# Allegro board topeet_rk3568_main_v1_71_20260327.brd
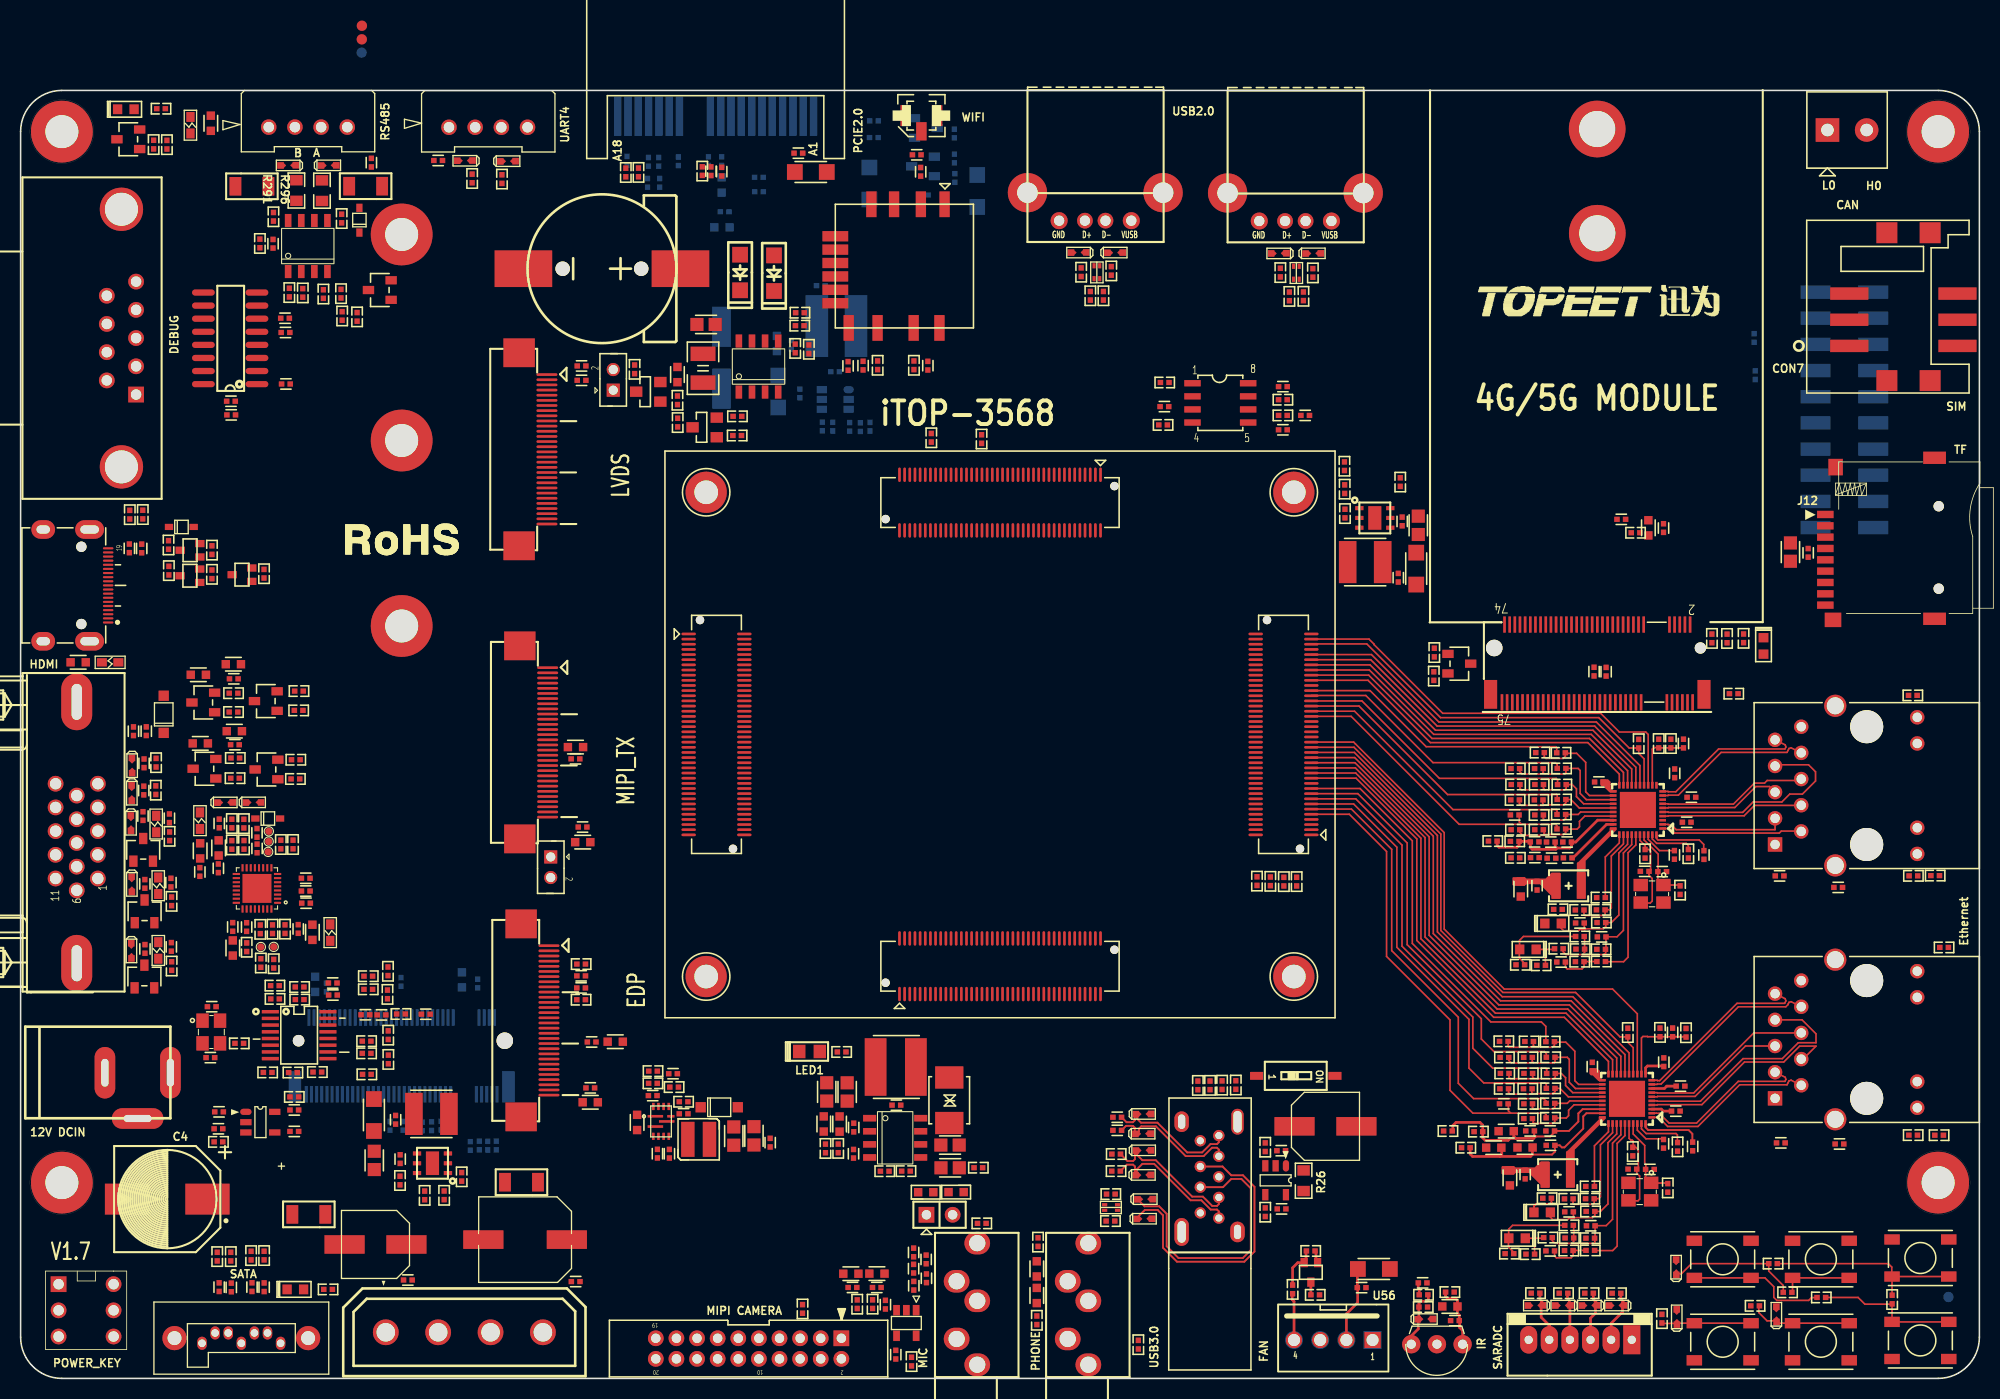
[diagram p0: board, top side]
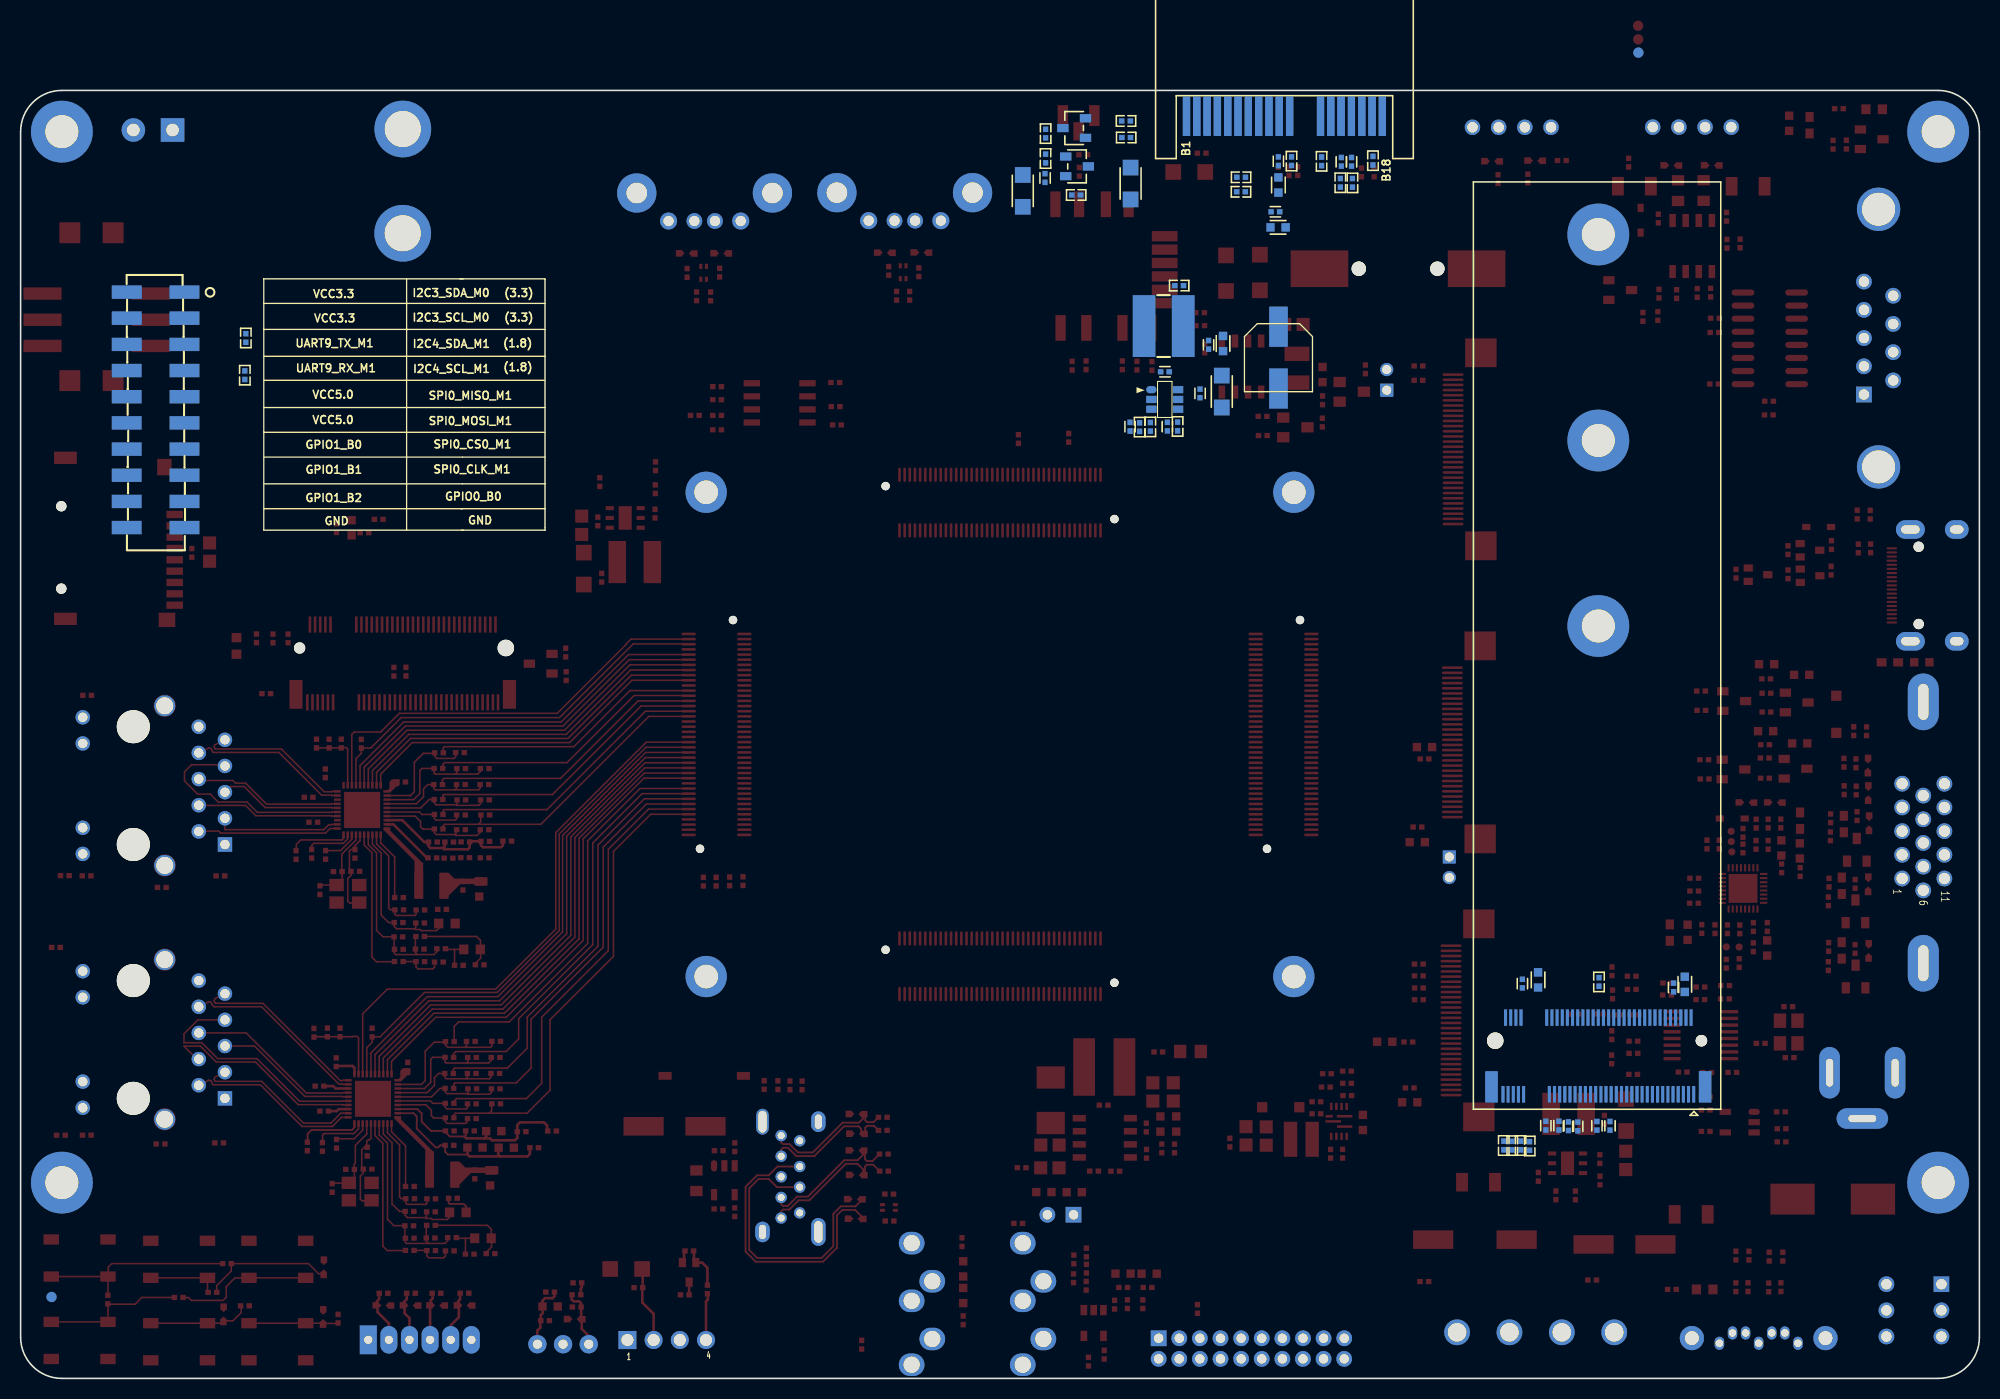
[diagram p1: board, bottom side, seen from below]

Outline 190 x 125 mm; copper layers: TOP, GND02, SIG03, BOTTOM. Coordinates in mm from the lower left corner of the outline.
Outline path: 0,121 0,4 arc(1.17,1.17) 4,0 186,0 arc(188.83,1.17) 190,4 190,121 arc(188.83,123.83) 186,125 4,125 arc(1.17,123.83) 0,121

## Design rules (mm)
constraint set DEFAULT: min track width 0.152, pair gap 0.178
net group DIFFPAIR0: nets HDMI_TXCLKN_PORT HDMI_TXCLKP_PORT
net group DIFFPAIR1: nets HDMI_TX0N_PORT HDMI_TX0P_PORT
net group DIFFPAIR2: nets HDMI_TX1N_PORT HDMI_TX1P_PORT
net group DIFFPAIR3: nets HDMI_TX2N_PORT HDMI_TX2P_PORT
net group DIFFPAIR4: nets MIPI_DSI_TX1_D3N/LVDS_TX1_D3N MIPI_DSI_TX1_D3P/LVDS_TX1_D3P
net group DIFFPAIR5: nets MIPI_DSI_TX1_D2N/LVDS_TX1_D2N MIPI_DSI_TX1_D2P/LVDS_TX1_D2P
net group DIFFPAIR6: nets MIPI_DSI_TX1_CLKN/LVDS_TX1_CLKN MIPI_DSI_TX1_CLKP/LVDS_TX1_CLKP
net group DIFFPAIR7: nets MIPI_DSI_TX1_D1N/LVDS_TX1_D1N MIPI_DSI_TX1_D1P/LVDS_TX1_D1P
net group DIFFPAIR8: nets MIPI_DSI_TX1_D0N/LVDS_TX1_D0N MIPI_DSI_TX1_D0P/LVDS_TX1_D0P
net group DIFFPAIR9: nets PCIE30_RX1N PCIE30_RX1P
net group DIFFPAIR10: nets PCIE30_RX0N PCIE30_RX0P
net group DIFFPAIR11: nets PCIE30_TX1N PCIE30_TX1P
net group DIFFPAIR12: nets PCIE30_TX0N PCIE30_TX0P
net group DIFFPAIR13: nets PCIE30_REFCLKN_IN PCIE30_REFCLKP_IN
net group DIFFPAIR14: nets PCIE20_RXN PCIE20_RXP
net group DIFFPAIR15: nets PCIE20_TXN PCIE20_TXP
net group DIFFPAIR16: nets USB2_HOST3_DM USB2_HOST3_DP
net group DIFFPAIR17: nets USB2_HOST2_DM USB2_HOST2_DP
net group DIFFPAIR18: nets MIPI_CSI_RX_D3N MIPI_CSI_RX_D3P
net group DIFFPAIR19: nets MIPI_CSI_RX_D2N MIPI_CSI_RX_D2P
net group DIFFPAIR20: nets MIPI_CSI_RX_D1N MIPI_CSI_RX_D1P
net group DIFFPAIR21: nets MIPI_CSI_RX_D0N MIPI_CSI_RX_D0P
net group DIFFPAIR22: nets MIPI_CSI_RX_CLK0N MIPI_CSI_RX_CLK0P
net group DIFFPAIR23: nets EDP_TX_D3N EDP_TX_D3P
net group DIFFPAIR24: nets EDP_TX_D2N EDP_TX_D2P
net group DIFFPAIR25: nets EDP_TX_D1N EDP_TX_D1P
net group DIFFPAIR26: nets EDP_TX_D0N EDP_TX_D0P
net group DIFFPAIR27: nets EDP_TX_AUXN EDP_TX_AUXP
net group DIFFPAIR28: nets USB3_OTG0_DM USB3_OTG0_DP
net group DIFFPAIR29: nets USB3_OTG0_SSRXN USB3_OTG0_SSRXP
net group DIFFPAIR30: nets USB3_OTG0_SSTXN USB3_OTG0_SSTXP
net group DIFFPAIR31: nets USB3_HOST1_SSRXN USB3_HOST1_SSRXP
net group DIFFPAIR32: nets USB3_HOST1_SSTXN USB3_HOST1_SSTXP
net group DIFFPAIR41: nets MIPI_DSI_TX0_D2N/LVDS_TX0_D2N MIPI_DSI_TX0_D2P/LVDS_TX0_D2P
net group DIFFPAIR42: nets MIPI_DSI_TX0_CLKN/LVDS_TX0_CLKN MIPI_DSI_TX0_CLKP/LVDS_TX0_CLKP
net group DIFFPAIR43: nets MIPI_DSI_TX0_D1N/LVDS_TX0_D1N MIPI_DSI_TX0_D1P/LVDS_TX0_D1P
net group DIFFPAIR44: nets MIPI_DSI_TX0_D0N/LVDS_TX0_D0N MIPI_DSI_TX0_D0P/LVDS_TX0_D0P
net group DIFFPAIR45: nets MIPI_DSI_TX0_D3N/LVDS_TX0_D3N MIPI_DSI_TX0_D3P/LVDS_TX0_D3P
net group DIFFPAIR46: nets PCIE30_REFCLKN_CON PCIE30_REFCLKP_CON
net group DIFFPAIR47: nets PI6C_03_CLK0N PI6C_03_CLK0P
net group DIFFPAIR48: nets PI6C_03_CLK1N PI6C_03_CLK1P
net group DIFFPAIR49: nets USB3_HOST1_DM USB3_HOST1_DP
net group DIFFPAIR51: nets USB3_OTG0SSTXN USB3_OTG0SSTXP
net group DIFFPAIR52: nets USB3_OTG0SSRXN USB3_OTG0SSRXP
net group DIFFPAIR53: nets USB3_OTG0DM USB3_OTG0DP
net group DIFFPAIR54: nets SATA2RXN SATA2RXP
net group DIFFPAIR55: nets SATA2TXN SATA2TXP
net group PCIE20_REFCLK: nets PCIE20_REFCLKN PCIE20_REFCLKP
net group PCIE20_RX: nets N19312586 N19312589
net group PCIE20_TXN: nets N19312407 N19312409
net group PHY1_LED2/CFG_LDO1: nets N17271062 PHY1_LED2/CFG_LDO1
net group PHY1_RXCLK/PHYAD1: nets PHY1_RXCLK/PHYAD1 VCCIO_PHY1
net group PHY1_Y_LED+: nets PHY1_Y_LED+ VCC3V3_PHY1
net group SATA2_RX: nets N19323537 N19323540
net group SATA2_TX: nets N19323473 N19323476
net group PWR_PH: nets VCC3V3_SYS
nets with their own width: min track width 0.254; nets GND

## Placement (name value [footprint] x y rotation side)
BACK  KEY  [SW4-SMD]  165.1 11.56 180 top
BAT1  CR1220  [BAT1]  64.01 107.7 0 top
C1  0.01uF  [C0402]  84.95 26.52 0 top
C2  47uF  [C0805]  80.18 27.8 90 top
C3  47uF  [C0805]  78.19 27.8 90 top
C4  470uF/35V  [CAP-S-10X10]  14.22 17.4 180 top
C5  4.7uF  [C0603]  77.91 24.69 90 top
C6  4.7uF  [C0603]  79.44 24.69 90 top
C7  0.1uF  [C0402]  80.81 24.35 90 top
C8  1000pF  [C0805]  90.16 20.44 180 top
C9  47pF  [C0805]  90.15 22.65 180 top
C10  0.01uF  [C0402]  80.79 21.8 270 top
C20  1uF  [C0805]  66.49 102.29 0 top
C21  100nF  [C0402]  106.37 24.07 0 top
C22  100nF  [C0402]  106.37 25.34 0 top
C23  1uF  [C0402]  122.31 16.45 180 top
C24  120uF  [E_C6]  126.57 24.47 270 top
C25  100nF  [C0402]  122.28 22.1 180 top
C34  0.1UF 16V  [C0402]  110.95 94.32 180 top
C35  100PF 50V  [C0402]  122.44 92.06 180 top
C36  100PF 50V  [C0402]  122.44 96.25 180 top
C37  0.1uF  [C0402]  83.89 7.16 90 top
C38  1uF  [C0402]  84.89 2.3 270 top
C39  10uF  [C0603]  83.06 10.17 180 top
C40  10uF  [C0603]  80.53 10.16 0 top
C41  100nF  [C0402]  80.69 8.83 0 top
C42  100nF  [C0402]  83.05 8.82 0 top
C43  100nF  [C0402]  10.55 80.56 90 top
C44  1uF  [C0402]  11.74 80.55 270 top
C45  10uF  [C0603]  53.82 61.27 0 top
C46  100nF  [C0402]  53.82 60.13 0 top
C47  10uF  [C0603]  54.52 52.05 0 top
C48  100nF  [C0402]  54.51 53.51 0 top
C49  10uF  [C0603]  63.71 97.42 90 top
C50  47uF  [C1210]  66.19 98.04 90 top
C51  1uF  [C0402]  54.41 98.26 0 top
C52  0.1uF  [C0402]  54.41 96.86 0 top
C53  100nF  [C0402]  54.37 37.89 180 top
C54  0.1uF  [C0402]  54.37 39.07 0 top
C55  10uF  [C0603]  57.68 32.68 0 top
C56  100nF  [C0402]  55.39 32.65 0 top
C57  10uF  [C0603]  55.26 26.8 0 top
C58  100nF  [C0402]  55.26 28.19 0 top
C59  100nF  [C0402]  21.92 43.8 270 top
C60  4.7uF  [C0603]  20.58 41.77 270 top
C61  100nF  [C0402]  20.57 43.81 270 top
C62  2pF  [C0402]  14.62 41.88 270 top
C63  2pF  [C0402]  12.06 41.68 90 top
C64  100nF  [C0402]  27.68 46.12 180 top
C65  2pF  [C0402]  14.58 48.11 270 top
C66  2pF  [C0402]  12.05 47.99 90 top
C67  100nF  [C0402]  27.66 47.3 180 top
C68  100nF  [C0402]  19.18 49.51 90 top
C69  4.7uF  [C0603]  19.21 51.48 90 top
C70  2pF  [C0402]  14.43 54.36 270 top
C71  2pF  [C0402]  11.87 54.58 90 top
C72  100nF  [C0402]  27.66 48.54 0 top
C73  2pF  [C0402]  11.95 57.05 270 top
C74  10uF  [C0603]  20.64 69.31 0 top
C75  100nF  [C0402]  20.68 67.9 0 top
C76  4.7uF  [C0603]  17.24 68.29 0 top
C77  18pF  [C0402]  19.26 53.86 90 top
C78  18pF  [C0402]  22.93 52.95 270 top
C79  100nF  [C0402]  22.94 51.43 270 top
C80  2pF  [C0402]  11.97 59.7 270 top
C81  10uF  [C0603]  20.73 62.81 0 top
C82  100nF  [C0402]  20.79 61.5 0 top
C83  10uF  [C0603]  17.43 61.63 0 top
C84  4.7uF  [C0603]  17.42 51.2 90 top
C85  100nF  [C0402]  17.39 49.15 90 top
C86  100nF  [C0603]  5.58 69.5 180 top
C87  4.7uF  [C0603]  28.3 43.29 270 top
C88  100nF  [C0402]  26.93 43.62 270 top
C89  1uF  [C0402]  12.19 62.82 90 top
C90  100nF  [C0402]  10.95 62.81 90 top
C91  15P  [C0402]  87.31 117.1 270 top
C92  NC  [C0402]  86.92 118.75 180 top
C93  0.1uF  [C0402]  80.26 98.26 270 top
C94  NC  [C0402]  81.72 98.29 90 top
C95  NC  [C0402]  88 98.29 90 top
C96  47uF  [C0805]  171.67 80.19 270 top
C97  0.1uF  [C0402]  173.39 80.12 270 top
C98  18pF  [C0402]  158.04 20.28 0 top
C99  18pF  [C0402]  156.34 20.31 180 top
C100  DNP  [C0402]  148.37 12.37 180 top
C101  100nF  [C0402]  170.74 22.86 0 top
C102  100nF  [C0402]  176.43 22.75 0 top
C103  100pF  [C0402]  152.31 14.81 180 top
C104  100pF  [C0402]  150.2 16.16 180 top
C105  4.7uF  [C0603]  144.1 24 180 top
C106  1uF  [C0402]  146.42 24.02 180 top
C107  100nF  [C0402]  148.37 24.01 180 top
C108  100nF  [C0402]  152.45 30.25 90 top
C109  4.7uF  [C0603]  145.93 22.41 180 top
C110  100nF  [C0402]  162.19 22.51 270 top
C111  4.7uF  [C0603]  144.46 19.46 270 top
C112  100nF  [C0402]  145.94 19.79 270 top
C113  100nF  [C0402]  159.39 30.69 90 top
C114  100nF  [C0402]  160.24 33.58 90 top
C115  4.7uF  [C0603]  142.9 22.39 180 top
C116  100nF  [C0402]  148.4 22.62 180 top
C117  100nF  [C0402]  159.36 22.77 270 top
C118  100nF  [C0402]  161.01 28.36 0 top
C119  100nF  [C0402]  160.55 25.94 0 top
C120  DNP  [C0402]  143.87 26.65 180 top
C121  18pF  [C0402]  157.53 49.21 180 top
C122  18pF  [C0402]  159.23 49.19 0 top
C123  DNP  [C0402]  149.43 40.41 180 top
C124  100nF  [C0402]  170.62 48.77 0 top
C125  100nF  [C0402]  176.31 47.65 0 top
C126  100pF  [C0402]  153.36 42.85 180 top
C127  100pF  [C0402]  151.25 44.2 180 top
C128  1uF  [C0402]  146.86 52.07 0 top
C129  1uF  [C0402]  148.43 52.05 180 top
C130  100nF  [C0402]  150.01 52.05 180 top
C131  4.7uF  [C0603]  145.51 47.5 270 top
C132  100nF  [C0402]  147.1 47.82 270 top
C133  100nF  [C0402]  153.09 57.88 180 top
C134  4.7uF  [C0402]  146.88 50.54 180 top
C135  100nF  [C0402]  160.44 58.72 90 top
C136  100nF  [C0402]  163.28 50.8 270 top
C137  100nF  [C0402]  161.3 61.61 90 top
C138  100nF  [C0402]  161.61 53.98 0 top
C139  100nF  [C0402]  162.07 56.4 0 top
C140  100nF  [C0402]  160.42 50.8 270 top
C141  4.7uF  [C0402]  148.49 50.49 180 top
C142  100nF  [C0402]  150.07 50.52 180 top
C143  DNP  [C0402]  144.93 54.68 180 top
C144  10uF  [C0603]  98.57 8.04 90 top
C145  10uF  [C0603]  98.57 10.63 90 top
C148  0.1uF  [C0402]  87.84 11.55 90 top
C150  100pF  [C0402]  86.62 10.65 270 top
C151  0.1uF  [C0402]  87.87 9.71 90 top
C152  100pF  [C0402]  86.62 12.22 90 top
C153  100pF  [C0402]  86.64 8.99 270 top
C163  10nF  [C0402]  23.62 8.85 270 top
C164  10nF  [C0402]  22.44 8.86 270 top
C165  10nF  [C0402]  20.43 8.83 270 top
C166  10nF  [C0402]  19.25 8.86 270 top
C167  120uF  [E_C6]  34.42 13 90 top
C168  100nF  [C0402]  37.56 9.55 0 top
C171  100uF  [E_E7]  48.93 13.47 180 top
C172  100nF  [C0402]  53.84 9.4 180 top
C180  10uF  [C0603]  28.57 38.24 90 bottom
C181  100nF  [C0402]  29.66 37.94 90 bottom
C184  22uF  [C0603]  42.81 38.68 90 bottom
C185  100nF  [C0402]  44.33 38.32 90 bottom
C188  1uF  [C0402]  30.27 38.37 0 top
C189  100nF  [C0402]  30.3 37.21 0 top
C190  1uF  [C0402]  35.01 35.28 0 top
C191  100nF  [C0402]  33.44 35.29 0 top
C192  4.7uF  [C0402]  39.3 35.34 0 top
C193  18pF  [C0402]  18.54 36.07 0 top
C194  18pF  [C0402]  18.41 31.13 180 top
C195  1uF  [C0402]  19.25 25.87 180 top
C196  4.7uF  [C0402]  26.55 26.05 0 top
C197  100nF  [C0402]  19.19 24.23 180 top
C198  DNP  [C0402]  26.55 23.97 0 top
C209  22uF  [C0805]  135.57 82.79 270 top
C210  100nF  [C0402]  134.01 83.17 270 top
C211  100nF  [C0402]  133.63 77.71 90 top
C212  1nF  [C0402]  136 9.27 0 top
C213  100nF  [C0402]  139.13 5.61 180 top
C214  10uF  [C0603]  138.64 6.98 180 top
C215  0.1uF  [C0402]  20.43 93.51 0 top
C216  0.1uF  [C0402]  20.4 94.84 0 top
C217  0.1uF  [C0402]  25.65 102.89 0 top
C218  0.1uF  [C0402]  25.73 96.51 180 top
C219  0.1uF  [C0402]  25.69 101.51 180 top
C221  100nF  [C0402]  40.5 118.2 180 top
C223  100nF  [C0402]  24.49 110.12 270 top
C224  4.7nF  [C0402]  34.02 117.99 90 top
C226  100nF  [C0603]  18.45 121.81 270 top
C263  100nF  [C0402]  36.37 25.1 270 top
C264  22uF  [C0805]  34.3 21.16 90 top
C265  100nF  [C0402]  36.82 21.28 90 top
C270  0.1uF  [C0402]  35.83 24.52 270 bottom
C271  0.1uF  [C0402]  37.1 24.52 270 bottom
C272  0.1uF  [C0402]  38.96 24.46 90 bottom
C273  0.1uF  [C0402]  39.86 24.48 90 bottom
C274  0.1uF  [C0402]  40.78 24.53 270 bottom
C275  0.1uF  [C0402]  42.05 24.53 270 bottom
C276  4700PF 50V  [C0402]  124.6 93.46 0 top
C277  1uF  [C0402]  62.93 21.8 270 top
C278  NC  [C0402]  61.31 27.45 180 top
C279  100nF  [C0402]  72.71 22.88 90 top
C280  1uF  [C0402]  63.28 29.57 0 top
C281  22uF  [C0805]  71.13 23.54 90 top
C282  220nF  [C0402]  64.31 25.68 0 top
C283  22uF  [C0805]  69.18 23.52 90 top
C284  100nF  [C0402]  61.77 21.81 270 top
C285  10uF  [C0603]  59.8 24.84 270 top
C286  100nF  [C0402]  130.08 8.81 0 top
C287  10uF  [C1206]  131.26 10.62 0 top
C427  100nF  [C0402]  153.79 68.58 90 top
C428  100nF  [C0402]  152.62 68.6 90 top
C434  100nF  [C0402]  159.36 82.53 90 top
C436  100nF  [C0402]  155.26 83.37 0 top
C437  22uF  [C0603]  157.89 82.55 90 top
C8303  10uF  [C1206]  92.79 115.25 270 bottom
C8304  100nF  [C0402]  90.63 116.5 270 bottom
C8305  10uF  [C1206]  82.33 115.97 270 bottom
C8306  10uF  [C0603]  68 115.82 270 bottom
C8307  100nF  [C0402]  68 118.13 270 bottom
C8308  10uF  [C1206]  76.65 117.08 0 top
C8309  100nF  [C0402]  75.44 118.91 0 top
C8310  22uF  [C0603]  68.03 111.71 180 bottom
C8311  100nF  [C0402]  68.29 113.22 180 bottom
C8313  100nF  [C0402]  68.01 117.12 270 top
C8314  100nF  [C0402]  79 97.7 180 bottom
C8315  10uF  [C1206]  73.48 95.78 90 bottom
C8316  100nF  [C0402]  75.59 95.6 90 bottom
C8317  22pF  [C0402]  82.38 92.37 90 bottom
C8318  100nF  [C0402]  78.77 92.37 270 bottom
C8319  120uF  [E_C6]  67.99 99.06 0 bottom
C8320  10uF  [C0603]  73.37 100.43 270 bottom
C8321  100nF  [C0402]  74.77 100.31 270 bottom
C8327  100nF  [C0402]  61.89 118.07 90 bottom
C8328  100nF  [C0402]  60.9 118.07 90 bottom
C8329  100nF  [C0402]  66.96 117.16 270 top
CA2  22uF  [C1206]  135.37 78.59 90 top
CA3  22uF  [C1206]  34.27 25.56 270 top
CON1  CON40X2_0_5MM  [CON2X40-0_5MM-AA]  122.5 62.5 90 top
CON2  CON40X2_0_5MM  [CON2X40-0_5MM-AA]  95 40 0 top
CON3  CON40X2_0_5MM  [CON2X40-0_5MM-AA]  67.5 62.5 270 top
CON4  CON40X2_0_5MM  [CON2X40-0_5MM-AA]  95 85 180 top
CON7  CON_SIM_CARD6  [CON6-SIM]  182.63 104.01 0 top
CON9  CON_DB9  [DSUB9-RA-FE]  9.78 100.97 180 top
CON12  2EG01827-D2D-DF  [PCIE36-40-EDGE_X1]  69.95 122.49 180 bottom
D1  B340A  [DO214AA]  90.08 26.99 90 top
D2  IN4148  [D1206]  73.08 107.26 90 top
D3  IN4148  [D1206]  69.79 107.33 90 top
D4  ESD5311X  [ESD0402]  108.93 22.13 0 top
D5  ESD5311X  [ESD0402]  108.91 19.75 0 top
D7  ESD5311X  [ESD0402]  108.88 23.75 0 top
D8  ESD5311X  [ESD0402]  108.93 25.66 0 top
D9  ESD5341N  [ESD0402]  109.01 15.5 0 top
D10  ESD5341N  [ESD0402]  109.09 17.4 0 top
D17  ESD5341N  [ESD0402]  125.39 109.19 0 top
D18  ESD5341N  [ESD0402]  122.03 109.18 180 top
D19  ESD5341N  [ESD0402]  106.18 109.26 0 top
D20  ESD5341N  [ESD0402]  102.62 109.26 180 top
D21  B5819WS  [SOD_323]  15.59 82.63 180 top
D22  ESD5341N  [ESD0402]  10.75 41.49 270 top
D23  ESD5341N  [ESD0402]  10.79 47.95 270 top
D24  B5819WS  [SOD_323]  23.97 54.34 180 top
D25  ESD5341N  [ESD0402]  10.71 53.88 270 top
D26  ESD5341N  [ESD0402]  10.79 56.8 270 top
D27  ESD5341N  [ESD0402]  22.6 55.9 0 top
D28  ESD5341N  [ESD0402]  19.85 55.9 0 top
D29  ESD5341N  [ESD0402]  10.82 59.47 270 top
D30  BAV99  [SOT_23]  12.01 39 0 top
D31  BAV99  [SOT_23]  12.02 45.33 0 top
D32  BAV99  [SOT_23]  11.89 51.3 0 top
D33  B5819W  [SOD_123]  13.88 64.45 270 top
D35  ESD5451N  [ESD0402]  136.26 5.76 0 top
D36  ESD5451N  [ESD0402]  160.58 10.79 90 top
D37  ESD5451N  [ESD0402]  170.31 6.22 90 top
D38  ESD5451N  [ESD0402]  160.65 5.97 90 top
D39  ESD5451N  [ESD0402]  146.93 7.07 180 top
D40  ESD5451N  [ESD0402]  149.59 7.07 180 top
D41  ESD5451N  [ESD0402]  152.17 7.07 180 top
D42  ESD5451N  [ESD0402]  154.8 7.07 180 top
D43  B5819WS  [SOD_323]  32.86 112.4 270 top
D44  NC  [SOD_123]  67.77 26.31 180 top
ED10  ESD5451N  [ESD0402]  47.28 118.13 0 top
ED11  ESD5451N  [ESD0402]  43.08 118.17 180 top
ED16  ESD5451N  [ESD0402]  25.95 117.72 180 top
ED17  ESD5451N  [ESD0402]  29.89 117.73 0 top
FB1  26R-100M  [L0603]  13.36 41.53 270 top
FB2  26R-100M  [L0603]  13.35 47.81 270 top
FB3  26R-100M  [L0603]  13.15 53.8 270 top
FB4  120R-100MHz  [L0603]  17.4 54.13 270 top
FB5  120R-100MHz  [L0603]  8.68 69.49 0 top
FB6  120R-100MHz  [L0603]  30.03 43.26 90 top
FB7  120R-100MHz  [L0603]  16.47 121.62 270 top
FB9  -  [FB0603]  87.8 18.07 0 top
FB10  -  [FB0603]  90.74 18.08 180 top
H1  HOLE  [HOLE2_3-M2]  66.5 86 0 top
H2  HOLE  [HOLE2_3-M2]  66.5 39 0 top
H3  HOLE  [HOLE2_3-M2]  123.5 86 0 top
H4  HOLE  [HOLE2_3-M2]  123.5 39 0 top
H5  HOLE  [HOLE3_2X6]  4 121 0 top
H6  HOLE  [HOLE3_2X6]  4 19 0 top
H7  HOLE  [HOLE3_2X6]  186 121 0 top
H8  HOLE  [HOLE3_2X6]  186 19 0 top
HOME  KEY  [SW4-SMD]  184.28 3.68 0 top
IR1  IRM_3638  [IJ3_IRM_3638]  137.38 3.32 0 top
J1  PS_L  [SWITCH_DDSZ]  9.02 9.14 270 top
J2  USB30_A_V  [USB30A9_25R70X7R32X13R85]  115.33 19.56 270 top
J5  USB20_TPYEA_01  [USB-A2]  127.15 112.33 0 top
J6  USB20_TPYEA_01  [USB-A2]  107.74 112.36 0 top
J7  MD60-19P  [HDMI-C]  4.19 76.96 90 top
J8  30PIN FPC CON  [FPC30-050]  51.12 61.73 90 top
J9  LVDS_QM  [FPC30-050]  51.05 90.17 90 top
J10  30PIN FPC CON  [FPC30-050]  51.25 34.74 90 top
J11  VGA_DB15  [DSUB15B]  7.49 48.51 90 top
J12  CONN_SD_CARD 9  [TF-CARD]  186.06 80.64 0 top
J13  HR911130C  [RJ10-SRLBY]  179.07 32.89 270 top
J14  HR911130C  [RJ10-SRLBY]  179.07 57.53 270 top
J15  VPH-3003J-CT  [EAR_JACK]  107.57 0.13 90 top
J16  JACK_AU  [EAR_JACK]  96.79 0.13 90 top
J18  M2_NGFF_M_KEY  [CON67-M02NGFF]  37.08 71.12 0 bottom
J20  -  [SATA30_7P_V_DIP]  25.22 3.41 0 top
J21  SATA_IDE_DIP_4Pin  [SATA-IDE4M_5R08_DIP]  35.42 4.47 0 top
J24  CON6M_1X6_2R54_V  [SIP6-FA1]  151.28 3.74 180 top
J26  CN4M_2R54_V  [CN4M_2R54_V_P_DIP]  45.36 121.42 0 top
J29  CN4M_2R54_V  [CN4M_2R54_V_P_DIP]  27.88 121.44 0 top
J33  -  [A4B-2PA-2_54DSA]  89.14 15.88 90 top
J34  HEADER 2  [HEADER2-3_8]  177.16 121.16 0 top
J37  P5D02A-4.0\2.0\2.5-A1  [HEAD2-79]  51.42 49.61 270 top
J38  P5D02A-4.0\2.0\2.5-A1  [HEAD2-79]  57.49 96.91 90 top
J39  CON_2_10  [CON_2_10_2_54]  172.15 61.06 270 bottom
JACK1  POWER JACK_3  [JACK-2_5MM_B]  14.53 29.67 90 top
L1  4.7uH  [L6X6-CDRH58D18R]  84.88 30.22 180 top
L3  NC  [RP2_0405]  105.77 16.59 180 top
L5  NC  [RP2_0405]  123.75 107.3 270 top
L6  NC  [RP2_0405]  104.4 107.36 270 top
L7  2.2uH  [IND2520]  149.1 19.77 180 top
L8  2.2uH  [IND2520]  150.15 47.8 180 top
L10  3.3uH(CDRH3D18ENP-3R3NC)  [L4X4-S]  130.42 79.22 0 top
L17  3.3uH(CDRH3D18ENP-3R3NC)  [L4X4-S]  39.85 25.67 180 top
L18  PCMB051H-2R2MS/6A  [IND_303015]  65.77 23.2 90 top
L8300  4.7uH  [IND_606045]  79.13 102.13 180 bottom
LED1  LED-Red (SMD 2012)  [LED-2012]  76.52 31.73 180 top
LED2  LED_Yellow  [LED0603]  145.16 13.6 180 top
LED3  LED_GREEN  [LED0603]  147.59 16.11 0 top
LED4  LED_Yellow  [LED0603]  146.21 41.63 180 top
LED5  LED_GREEN  [LED0603]  148.65 44.15 0 top
LED8  LED_RED  [LED0603]  26.65 8.64 0 top
LED9  LED_BLUE  [LED0603]  10.21 123.17 0 top
LED10  LED_BLUE  [LED0603]  169.06 71.09 270 top
NOREF  -  [unnamed]  33.1 131.28 0 top
NOREF#2  -  [unnamed]  33.09 129.96 0 top
NOREF#3  -  [unnamed]  187 7.9 180 bottom
NOREF#4  -  [unnamed]  33.08 128.67 180 bottom
PWRON  KEY  [SW4-SMD]  174.62 3.56 0 top
Q2  2SK3018  [SOT_323]  125.15 10.29 180 top
Q5  2SK3018  [SOT_323]  16.42 77.9 90 top
Q6  2SK3018  [SOT_323]  16.44 80.37 90 top
Q7  2SK3018  [SOT_323]  21.47 78 90 top
Q8  AO3415A  [SOT-23]  60.89 95.76 270 top
Q9  L9014  [SOT-23]  66.36 92.31 270 top
Q10  WPM2015-3/TR  [SOT_23]  17.72 65.6 90 top
Q11  S8050  [SOT_23]  23.78 65.73 90 top
Q12  WPM2015-3/TR  [SOT_23]  17.83 59.17 90 top
Q13  S8050  [SOT_23]  23.85 59.1 90 top
Q16  S8050  [SOT_23]  10.44 120.26 90 top
Q17  S8050  [SOT_23]  34.84 105.63 90 top
Q35  S8050  [SOT_23]  139.55 69.36 270 top
Q8300  WPM3407-3/TR  [SOT_23]  87.53 117.63 270 bottom
Q8301  S8050  [SOT_23]  87.81 121.35 90 bottom
R1  125k  [R0402]  83.82 20.11 0 top
R2  10K  [R0402]  79.64 31.68 0 top
R3  400K  [R0402]  78.07 22.32 90 top
R4  25k  [R0402]  85.88 20.12 0 top
R5  29.4k  [R0402]  92.9 20.45 0 top
R6  68.1k  [R0402]  79.31 22.32 270 top
R19  10K  [R0402]  75.14 99.96 90 top
R20  10K  [R0402]  76.46 99.88 90 top
R21  10k  [R0402]  115.37 28.44 270 top
R22  15K  [R0402]  114.19 28.44 270 top
R23  0R  [R0402]  106.26 20.12 0 top
R24  0R  [R0402]  106.27 21.77 0 top
R25  100R  [R0402]  116.54 28.46 270 top
R26  0R  [R0805]  124.45 19.18 90 top
R27  10k  [R0402]  117.87 28.47 90 top
R28  2.2R  [R0402]  105.75 17.89 180 top
R29  2.2R  [R0402]  105.71 15.27 180 top
R30  DNP  [R0402]  120.73 16.13 270 top
R31  4.7K  [R0402]  120.73 22.44 90 top
R32  10k  [R0402]  88.34 91.29 270 top
R33  10k  [R0402]  93.21 91.16 270 top
R34  2.2K  [R0402]  75.59 103.43 180 top
R35  60.4R 1%  [R0402]  122.44 93.46 0 top
R36  60.4R 1%  [R0402]  122.44 94.98 0 top
R43  0R  [R0402]  122.19 107.32 90 top
R44  2.2R  [R0402]  123.07 105.01 90 top
R46  2.2R  [R0402]  124.43 105.02 90 top
R47  0R  [R0402]  125.35 107.29 90 top
R49  0R  [R0402]  102.87 107.36 90 top
R51  2.2R  [R0402]  103.76 105.07 90 top
R53  2.2R  [R0402]  105.03 105.07 90 top
R54  0R  [R0402]  105.79 107.48 90 top
R56  NC  [R0402]  75.85 6.74 270 top
R57  0R  [R0402]  82.64 7.21 270 top
R58  NC  [R0402]  81.15 7.2 270 top
R59  10k  [R0402]  18.56 78.04 90 top
R60  1.8K  [R0402]  14.38 78.39 270 top
R61  10k  [R0402]  18.56 80.39 90 top
R62  1.8K  [R0402]  14.35 80.88 270 top
R63  1K  [R0402]  10.59 83.83 270 top
R64  27K  [R0402]  23.61 78.1 90 top
R65  100K  [R0402]  11.85 83.84 90 top
R66  100K  [R0402]  63.71 94.93 270 top
R67  0R/NC  [R0402]  59.56 97.93 270 top
R68  22R  [R0402]  63.74 92.76 270 top
R69  1K  [R0402]  69.5 91.51 0 top
R70  10K/NC  [R0402]  69.53 93.37 0 top
R71  100K/NC  [R0402]  54.37 36.75 180 top
R72  100K/NC  [R0402]  54.37 40.21 0 top
R73  4.7K  [R0402]  24.43 43.6 90 top
R74  4.7K  [R0402]  23.25 43.58 90 top
R75  4.7K  [R0402]  21.93 41.84 270 top
R76  0R  [R0402]  23.3 40.31 90 top
R77  0R  [R0402]  24.55 40.25 90 top
R78  75R  [R0402]  14.65 40.02 270 top
R79  100K  [R0402]  25.65 43.6 270 top
R80  75R  [R0402]  14.64 46.3 270 top
R81  75R  [R0402]  14.45 52.61 270 top
R82  4.7K  [R0402]  26.43 51.82 270 top
R83  2.2K  [R0402]  20.49 53.85 270 top
R84  2.2K  [R0402]  21.65 53.84 270 top
R85  47R  [R0402]  13.11 57.09 90 top
R87  47R  [R0402]  20.49 51.78 90 top
R88  47R  [R0402]  21.67 51.78 90 top
R89  100K  [R0402]  20.66 66.5 0 top
R90  4.7K  [R0402]  25.24 51.81 90 top
R91  47R  [R0402]  13.14 59.76 90 top
R92  10k  [R0402]  20.65 64.67 0 top
R93  10k  [R0402]  27 66.71 180 top
R94  51K  [R0402]  26.97 64.83 0 top
R96  100K  [R0402]  20.82 60.21 0 top
R97  10k  [R0402]  20.8 58.25 180 top
R98  10k  [R0402]  26.69 60.04 180 top
R99  51K  [R0402]  26.65 58.18 0 top
R100  0R  [R0402]  86.65 98.33 270 top
R101  0R  [R0402]  83.13 98.33 270 top
R102  0R  [R0402]  156.38 22.01 270 top
R103  470R  [R0402]  186.58 41.83 180 top
R105  0R  [R0402]  159.78 18.49 90 top
R106  470R  [R0402]  183.58 23.61 0 top
R107  240R  [R0402]  186.09 23.6 180 top
R108  100R  [R0402]  152.26 12.42 0 top
R109  120R  [R0402]  150.18 12.41 180 top
R110  4.7K  [R0402]  152.22 17.44 180 top
R111  4.7K  [R0402]  150.17 17.43 0 top
R112  4.7K  [R0402]  152.25 13.61 180 top
R113  47K  [R0402]  150.23 13.63 0 top
R114  4.7K  [R0402]  152.28 16.2 180 top
R115  2.49K  [R0402]  160.73 22.47 270 top
R116  0R  [R0402]  150.19 14.85 180 top
R117  0R  [R0402]  152.24 18.63 180 top
R118  4.7K  [R0402]  143.87 32.71 180 top
R119  4.7K  [R0402]  146.33 32.7 0 top
R120  4.7K  [R0402]  146.23 25.21 180 top
R121  0R  [R0402]  148.15 13.67 180 top
R122  510R  [R0402]  144.42 12.11 180 top
R123  4.7K  [R0402]  146.24 26.65 180 top
R124  510R  [R0402]  146.44 12.06 180 top
R125  4.7K  [R0402]  146.2 28.11 180 top
R126  4.7K  [R0402]  143.91 28.11 0 top
R127  510R  [R0402]  148.07 17.48 180 top
R128  4.7K  [R0402]  146.24 29.6 180 top
R129  4.7K  [R0402]  143.96 29.6 0 top
R130  0R  [R0402]  141.41 23.95 0 top
R131  4.7K  [R0402]  146.22 31.15 180 top
R132  4.7K  [R0402]  143.93 31.15 0 top
R133  0R  [R0402]  138.45 24.01 0 top
R134  0R  [R0402]  140.19 22.39 0 top
R135  4.7K  [R0402]  161.55 33.55 270 top
R136  1.8K  [R0402]  155.9 33.56 270 top
R137  0R  [R0402]  159.02 33.58 270 top
R138  22R  [R0402]  148.41 28.15 180 top
R139  22R  [R0402]  148.45 29.6 180 top
R140  22R  [R0402]  148.42 31.16 180 top
R141  22R  [R0402]  148.36 32.68 180 top
R142  22R  [R0402]  148.39 25.29 180 top
R143  22R  [R0402]  148.39 26.7 180 top
R144  470R  [R0402]  183.55 66.29 0 top
R145  0R  [R0402]  157.57 50.91 270 top
R147  470R  [R0402]  183.6 48.77 0 top
R148  0R  [R0402]  160.97 47.39 90 top
R149  240R  [R0402]  185.71 48.8 180 top
R150  100R  [R0402]  153.31 40.46 0 top
R151  120R  [R0402]  151.23 40.44 180 top
R152  4.7K  [R0402]  153.27 45.47 180 top
R153  4.7K  [R0402]  151.23 45.46 0 top
R154  4.7K  [R0402]  153.31 41.64 180 top
R155  47K  [R0402]  151.29 41.66 0 top
R156  4.7K  [R0402]  153.33 44.24 180 top
R157  2.49K  [R0402]  161.77 50.92 270 top
R158  0R  [R0402]  151.25 42.89 180 top
R159  4.7K  [R0402]  147.38 60.73 0 top
R160  4.7K  [R0402]  147.28 53.25 180 top
R161  4.7K  [R0402]  145 53.25 0 top
R162  0R  [R0402]  149.21 41.7 180 top
R163  510R  [R0402]  145.47 40.14 180 top
R164  0R  [R0402]  153.3 46.67 180 top
R165  4.7K  [R0402]  147.29 54.68 180 top
R166  510R  [R0402]  147.49 40.09 180 top
R167  4.7K  [R0402]  147.25 56.14 180 top
R168  4.7K  [R0402]  144.97 56.14 0 top
R169  510R  [R0402]  149.12 45.52 180 top
R170  4.7K  [R0402]  147.3 57.63 180 top
R171  4.7K  [R0402]  145.01 57.63 0 top
R172  0R  [R0402]  144.93 52.12 0 top
R173  4.7K  [R0402]  147.27 59.18 180 top
R174  4.7K  [R0402]  144.99 59.18 0 top
R175  0R  [R0402]  142.8 52.15 0 top
R176  0R  [R0402]  144.99 50.52 0 top
R177  10k  [R0402]  158.9 61.61 270 top
R178  0R  [R0402]  160.08 61.61 270 top
R179  1.8K  [R0402]  156.95 61.6 270 top
R180  22R  [R0402]  149.47 56.18 180 top
R181  22R  [R0402]  149.5 57.63 180 top
R182  22R  [R0402]  149.47 59.2 180 top
R183  22R  [R0402]  149.42 60.72 180 top
R184  22R  [R0402]  149.45 53.32 180 top
R185  22R  [R0402]  149.45 54.73 180 top
R191  10K  [R0402]  98.69 13.23 90 top
R192  33R  [R0402]  98.57 5.64 90 top
R194  100K(NC)  [R0402]  108.42 3.27 270 top
R198  2K  [R0402]  93.24 15.04 180 top
R203  2K  [R0402]  86.42 1.63 270 top
R208  510R  [R0402]  29.82 8.64 180 top
R209  0R  [R1206]  27.96 15.92 0 top
R211  0R  [R1206]  48.58 19.04 0 top
R213  22R  [R0402]  46.14 22.6 270 bottom
R214  22R  [R0402]  45.31 22.59 270 bottom
R215  22R  [R0402]  44.5 22.61 270 bottom
R216  22R  [R0402]  43.62 22.56 270 bottom
R219  10k  [R0402]  24.67 38.12 180 top
R220  10k  [R0402]  24.68 36.83 180 top
R221  2.2R  [R0402]  36.89 35.37 0 top
R222  10k  [R0402]  27.07 36.76 180 top
R223  10k  [R0402]  27.06 37.98 0 top
R224  10k  [R0402]  28.78 29.73 180 top
R225  10k  [R0402]  26.41 29.68 180 top
R226  33R  [R0402]  33.72 39.03 0 top
R227  33R  [R0402]  33.72 37.76 0 top
R228  22R  [R0402]  21.21 32.52 0 top
R229  10k  [R0402]  23.96 29.7 0 top
R230  49.9R  [R0402]  35.59 37.27 270 top
R231  49.9R  [R0402]  35.64 39.51 90 top
R232  470R  [R0402]  33.58 29.51 0 top
R233  33R  [R0402]  33.56 32.73 0 top
R234  33R  [R0402]  33.56 31.55 0 top
R235  100K  [R0402]  19.19 22.96 0 top
R236  49.9R  [R0402]  35.67 30.96 270 top
R237  49.9R  [R0402]  35.66 33.31 90 top
R256  10K  [R0402]  133.82 86.99 270 top
R257  121K  [R0402]  128.41 88.53 90 top
R258  100K  [R0402]  128.46 83.93 270 top
R259  33K  [R0402]  128.43 86.3 270 top
R260  10k  [R0402]  136.06 6.92 180 top
R261  22R  [R0402]  136.08 8.11 0 top
R262  22R  [R0402]  138.64 8.38 180 top
R263  100R  [R0402]  171.39 8.35 0 top
R264  3K  [R0402]  169.99 11.14 0 top
R265  5.1K  [R0402]  181.54 7.65 270 top
R266  12K  [R0402]  174.67 7.86 180 top
R267  100R  [R0402]  168.24 7.04 0 top
R268  100R  [R0402]  159.21 5.8 270 top
R269  100R  [R0402]  154.8 8.26 0 top
R270  100R  [R0402]  152.14 8.27 0 top
R271  100R  [R0402]  149.66 8.27 0 top
R272  100R  [R0402]  146.95 8.27 0 top
R273  1K  [R0402]  13.62 123.23 180 top
R274  10k  [R0402]  14.19 119.73 270 top
R275  51K  [R0402]  12.9 119.74 90 top
R276  10k  [R0402]  121.23 48.24 270 top
R277  10k  [R0402]  123.77 48.21 90 top
R278  10k  [R0402]  119.93 48.26 90 top
R279  10k  [R0402]  122.53 48.21 270 top
R282  100R  [R0402]  43.8 116.45 90 top
R284  100R  [R0402]  46.69 116.4 90 top
R286  0R  [R0402]  23.21 110.15 270 top
R287  60.4R  [R1206]  22.43 115.7 180 top
R288  10k  [R0402]  29.37 105.24 90 top
R289  3.3K  [R0402]  31.14 112.57 90 top
R290  60.4R  [R1206]  33.47 115.71 0 top
R291  0R  [R0805]  26.75 115.28 90 top
R293  22R  [R0402]  26.07 105.38 90 top
R295  0R  [R0402]  27.37 105.35 90 top
R296  0R  [R0805]  29.23 115.27 90 top
R297  22R  [R0402]  31.08 105.28 90 top
R298  10k  [R0402]  31.19 103.11 270 top
R299  3.3K  [R0402]  24.53 112.74 270 top
R300  51K  [R0402]  32.64 103.02 90 top
R311  10K  [R0402]  36.8 19.2 90 top
R312  121K  [R0402]  39.19 17.76 270 top
R313  39K  [R0402]  41.08 17.77 90 top
R314  100K  [R0402]  42.78 19.56 90 top
R315  10K  [R0402]  36.9 38.48 90 bottom
R328  2.2K  [R0402]  75.58 102.17 180 top
R329  1K 1%  [R0402]  110.98 96.65 0 top
R330  12K 1%  [R0402]  110.82 92.54 0 top
R331  NC  [R0402]  61.34 29.82 0 top
R332  3.3R  [R0402]  64.31 26.85 0 top
R333  100K  [R0402]  63.39 28.27 180 top
R334  10K  [R0402]  61.34 28.64 180 top
R335  0  [R0402]  26.55 27.32 0 top
R336  1K  [R0402]  123.38 8.64 90 top
R337  10k  [R0402]  125.58 8.11 180 top
R338  10k  [R0402]  125.14 12.37 180 top
R1147  0R  [R0402]  166.17 66.45 0 top
R1148  510R  [R0402]  167.13 71.83 90 top
R1149  10k  [R0402]  156.65 82.07 180 top
R1150  0R_NC  [R0402]  165.52 71.81 90 top
R1151  100K  [R0402]  137.08 68.16 90 top
R1152  1K  [R0402]  137.13 70.44 90 top
R8300  22R  [R0402]  63.81 118.12 90 bottom
R8301  22R  [R0402]  66.72 118.14 90 bottom
R8302  22R  [R0402]  66.12 117.17 90 top
R8303  22R  [R0402]  58.82 118.18 90 bottom
R8304  0R  [R0402]  71.62 115.17 180 bottom
R8305  100K  [R0402]  90.58 118.39 90 bottom
R8306  0R  [R0402]  71.61 116.57 180 bottom
R8307  10k  [R0402]  90.58 120.81 90 bottom
R8308  10k  [R0402]  82.78 122.04 0 bottom
R8309  51K  [R0402]  82.76 120.43 180 bottom
R8310  10k  [R0402]  77.77 92.39 90 bottom
R8311  232K  [R0402]  81.46 92.33 90 bottom
R8312  49.9K  [R0402]  80.41 92.35 270 bottom
R9532  1K  [R0402]  164.06 71.82 270 top
R9533  2.2K  [R0402]  168.15 100.97 270 bottom
R9534  2.2K  [R0402]  168.25 97.36 90 bottom
R9535  0R  [R0402]  87.61 114.85 180 bottom
R9536  0R  [R0402]  77.62 106.06 180 bottom
R9551  0R  [R0402]  61.99 116.04 90 bottom
R9552  0R  [R0402]  60.81 116.03 90 bottom
R9555  0R  [R0402]  59.93 117.04 270 top
R9556  0R  [R0402]  58.7 117.04 270 top
R9557  0R  [R0402]  23.62 11.92 270 top
R9558  0R  [R0402]  22.36 11.92 270 top
R9559  0R  [R0402]  20.39 11.82 270 top
R9560  0R  [R0402]  19.07 11.82 270 top
RESET  KEY  [SW4-SMD]  165.1 3.56 0 top
SW3  SW DIP-1  [KHS01]  123.69 29.36 0 top
TP1  TP_0.7  [TP_0R70]  23.3 41.87 180 top
TP2  TP_0.7  [TP_0R70]  24.55 41.88 180 top
TP3  TP_0.7  [TP_0R70]  24.01 51.1 180 top
TP4  TP_0.7  [TP_0R70]  24.06 52.11 180 top
TP5  TP_0.7  [TP_0R70]  24.08 53.09 180 top
U1  TPS54331  [SOIC8]  84.83 23.35 0 top
U3  RX8010  [SOIC8]  71.58 98.2 90 top
U4  SY6280AAC/TCS9163  [SOT_23_5]  122.74 20.63 270 top
U6  RTL8211F-CG  [QFN40_5R00X5R00X0R90_T]  155.82 27.13 180 top
U7  TJA1040T  [SO8_1P27_4X5]  116.37 94.68 0 top
U8  MIPI CAMERA  [HDRMS2MM-2X10]  70.61 2.89 180 top
U9  SGM2019-2.8YN5G/TR  [SOT23-5]  85.92 5.38 180 top
U10  RTD2166  [QFN32_4R00X4R00X0R90_T]  22.93 47.56 180 top
U11  RTL8723  [M-BL-R8723BT1]  85.72 107.95 270 top
U12  UFL-R-SMT-1  [RF]  87.38 122.56 0 top
U14  RTL8211F-CG  [QFN40_5R00X5R00X0R90_T]  156.88 55.17 180 top
U15  PI6C557-03BLE  [TSSOP16-26-170]  27.02 33.31 270 top
U16  PT5108E23E-33  [SOT_23_5]  21.85 25.87 0 top
U19  MP2012DQ  [QFN6-0_95-3X3H]  131.36 83.51 0 top
U20  MAX3232CSE  [SOIC16]  20.33 100.94 180 top
U21  SIT3485E  [SOIC8]  27.85 109.9 90 top
U25  NB680GD  [QFN12_2R00X3R00X1R00]  62.12 24.94 0 top
U55  MP2012DQ  [QFN6-0_95-3X3H]  39.95 20.88 180 top
U56  CON4P  [SIP4-100]  131.14 3.72 0 top
U58  RM500U-CN  [M2_KEY_B]  152.94 70.89 180 top
U8300  SY8113B/SM8103ADC  [SOT_23_6]  79.02 95.01 180 bottom
VOL+  KEY  [SW4-SMD]  174.62 11.56 180 top
VOL-  KEY  [SW4-SMD]  184.28 11.68 180 top
Y1  25MHz  [CRY4_3R20X2R50X0R80]  157.06 18.13 180 top
Y2  25MHz  [CRY4_3R20X2R50X0R80]  158.25 47.03 180 top
Y3  25MHz  [CRY4_3R20X2R50X0R80]  18.49 33.62 270 top

## Library data of the parts
BACK HOME PWRON RESET VOL+ VOL- = SW-TACT_0
BAT1 = BATTERY_0
C1-C3 C5-C10 C20-C23 C25 C37-C48 C53-C91 C93-C95 C98-C143 C163-C166 C168 C172 C180 C181 C184 C185 C188-C198 C212-C214 C221 C223 C224 C226 C286 C287 C427 C428 C434 C436 C437 C8303-C8311 C8313-C8318 C8320 C8321 C8327-C8329 = CAP NP
C4 = CT2012_0: Tolerance: RichardLC
C24 C167 C171 C8319 = CAP
C34-C36 C276 = C
C49 C50 C150 C152 C153 C210 C211 C263 C265 C270-C275 C285 CA2 CA3 = C1608
C51 C52 C215-C219 = C0603_0
C92 = C1005
C96 C97 = CAP_NP
C144 C145 C148 C151 = SMALL CAP
C209 C264 = C1206_0
C277-C284 = CAP NP_1
CON1-CON4 = CON40X2_0_8MM
CON7 = CON_SIM_CARD6_2
CON9 = CON_DB9
CON12 = J2401827D12FC1
D1 = DIODE SCHOTTKY_5
D2 D3 D21 D24 D33 D43 D44 = DIODE
D4 D5 D7-D10 D17-D20 D22 D23 D25-D29 D35-D42 ED10 ED11 ED16 ED17 = DIODE BI_DIR TRIG
D30-D32 = BAV99
FB1-FB7 = BEAD
FB9 FB10 = FB1206_0
H1-H8 = RCA JACK_0
IR1 = IRM_0
J1 = U-MP2012DQ_2
J2 = USB30_TYPE_A_V_2
J5 J6 = USB20_TPYEA_4
J7 = MD60-19P_4
J8 J10 = LCD_Hitachi_TX05D99VM1AAA_25
J9 = LVDS_QM_2
J11 = VGA_0
J12 = CONN_MICRO_SDCARD_9P
J13 J14 = HR911130C_0
J15 = PHONOJACK STEREO-15_0
J16 = JACK_AU
J18 = M_02_NGFF_M_KEY
J20 = SATA_DIP_0
J21 = SATA_IDE_DIP_0
J24 = CON6_1X6
J26 J29 = CON4_0
J33 = CON2_2_54P
J34 = HEADER 2
J37 J38 = 2_00_1X2PIN
J39 = CON_2_10
JACK1 = POWER JACK_3
L1 L10 L17 = LQH32C_0
L3 L5 L6 = INDUCTOR COM
L7 L8 L18 L8300 = INDUCTORS OF FERRITE
LED1 = LED-RED_SMD_1
LED2-LED5 LED8-LED10 = LED
Q2 Q5-Q7 = MOSFET N
Q8 Q10 Q12 Q8300 = MOSFET P
Q9 = L14P2/TO_1
Q11 Q13 Q16 Q17 Q35 Q8301 = NPN
R1 R3-R6 R35 R36 R100 R101 R329 R330 = R
R2 R19 R20 R66-R70 R198 R203 R256-R259 R311-R315 = R1005_0
R21-R34 R43 R44 R46 R47 R49 R51 R53 R54 R56-R65 R71-R85 R87-R94 R96-R99 R102 R103 R105-R145 R147-R159 R164-R185 R208 R209 R211 R213-R216 R219-R237 R260-R279 R282 R284 R286-R291 R293 R295-R300 R328 R335-R338 R1147-R1152 R8300-R8312 R9532-R9536 R9551 R9552 R9555-R9560 = RESISTOR
R160-R163 = RESISTOR: signal model: R_R0402_5.1R_5.1R
R191 R192 R194 = SMALL R1
R331-R334 = RESISTOR_0
SW3 = SW DIP-7_0
TP1-TP5 = TP
U1 = RT8065_0: User Part Number: ***; Tolerance: ***
U3 = RX8010: User Part Number: ***; Tolerance: ***
U4 = SWITCH_SY6280
U6 U14 = Ethernet_RTL8211F
U7 = SN65HVD232D
U8 = MIPI CAMERA: Tolerance: RichardLC; User Part Number: pn
U9 = SGM2019-1.2YN5G/TR
U10 = RTD2166
U11 = RTL8723_0
U12 = UFL-R-SMT-1_0
U15 = PI6C557-03BLE_0
U16 = LDO_PT5108
U19 U55 = U-MP2012DQ: User Part Number: pn; Tolerance: RichardLC
U20 = MAX3232EEAE
U21 = MAX3485_0: User Part Number: ***; Tolerance: ***
U25 = DCDC_NB680
U56 = CON4P
U58 = RM500U-CN
U8300 = DCDC_SY8113
Y1-Y3 = CRYSTAL_4P

## Footprints (pads in the part's own frame, mm; a bottom-side part is the same pattern mirrored in y, then rotated)
A4B-2PA-2_54DSA
  rect 1.524x1.524 hole 0.914: 1(0,1.27)
  round 1.524 hole 0.914: 2(0,-1.27)
BAT1
  round 1.397 hole 1.397 unplated: (-11.43,0) (-3.81,0)
  rect 5.588x3.556 smd: 1(0,0) 2(-15.24,0)
C0402
  rect 0.533x0.508 smd: 1(-0.419,0) 2(0.419,0)
C0603
  rect 0.813x0.813 smd: 1(-0.737,0) 2(0.737,0)
C0805
  rect 1.27x1.27 smd: 1(-0.889,0) 2(0.889,0)
C1206
  rect 1.524x1.524 smd: 1(-1.549,0) 2(1.549,0)
C1210
  rect 1.397x2.413 smd: 1(-1.397,0) 2(1.397,0)
CAP-S-10X10
  rect 4.3x3 smd: 1(-3.9,0) 2(3.9,0)
CN4M_2R54_V_P_DIP
  round 1.5 hole 1.02: 1(-3.81,0) 2(-1.27,0) 3(1.27,0) 4(3.81,0)
CON2X40-0_5MM-AA
  round 0.813 hole 0.813 unplated: (-11.1,-1.6) (11.1,1.6)
  oval 0.254x1.397 smd: 1(-9.75,-2.7) 2(-9.75,2.7) 3(-9.25,-2.7) 4(-9.25,2.7) 5(-8.75,-2.7) 6(-8.75,2.7) 7(-8.25,-2.7) 8(-8.25,2.7) 9(-7.75,-2.7) 10(-7.75,2.7) 11(-7.25,-2.7) 12(-7.25,2.7) 13(-6.75,-2.7) 14(-6.75,2.7) 15(-6.25,-2.7) 16(-6.25,2.7) 17(-5.75,-2.7) 18(-5.75,2.7) 19(-5.25,-2.7) 20(-5.25,2.7) 21(-4.75,-2.7) 22(-4.75,2.7) 23(-4.25,-2.7) 24(-4.25,2.7) 25(-3.75,-2.7) 26(-3.75,2.7) 27(-3.25,-2.7) 28(-3.25,2.7) 29(-2.75,-2.7) 30(-2.75,2.7) 31(-2.25,-2.7) 32(-2.25,2.7) 33(-1.75,-2.7) 34(-1.75,2.7) 35(-1.25,-2.7) 36(-1.25,2.7) 37(-0.75,-2.7) 38(-0.75,2.7) 39(-0.25,-2.7) 40(-0.25,2.7) 41(0.25,-2.7) 42(0.25,2.7) 43(0.75,-2.7) 44(0.75,2.7) 45(1.25,-2.7) 46(1.25,2.7) 47(1.75,-2.7) 48(1.75,2.7) 49(2.25,-2.7) 50(2.25,2.7) 51(2.75,-2.7) 52(2.75,2.7) 53(3.25,-2.7) 54(3.25,2.7) 55(3.75,-2.7) 56(3.75,2.7) 57(4.25,-2.7) 58(4.25,2.7) 59(4.75,-2.7) 60(4.75,2.7) 61(5.25,-2.7) 62(5.25,2.7) 63(5.75,-2.7) 64(5.75,2.7) 65(6.25,-2.7) 66(6.25,2.7) 67(6.75,-2.7) 68(6.75,2.7) 69(7.25,-2.7) 70(7.25,2.7) 71(7.75,-2.7) 72(7.75,2.7) 73(8.25,-2.7) 74(8.25,2.7) 75(8.75,-2.7) 76(8.75,2.7) 77(9.25,-2.7) 78(9.25,2.7) 79(9.75,-2.7) 80(9.75,2.7)
CON6-SIM
  rect 3.7x1.2 smd: 1(-5.25,-3.81) 2(-5.25,-1.27) 3(-5.25,1.27) 4(5.25,-3.81) 5(5.25,-1.27) 6(5.25,1.27)
  rect 2.032x2.032 smd: 7(-1.6,-7.175) 8(2.6,-7.175) 9(-1.6,7.175) 10(2.6,7.175)
CON67-M02NGFF
  round 1.118 hole 1.118 unplated: (-10.121,38.347)
  round 1.6 hole 1.6 unplated: (9.879,38.347)
  rect 0.3x1.6 smd: 1(-9.371,43.547) 2(-9.121,36.097) 3(-8.871,43.547) 4(-8.621,36.097) 5(-8.371,43.547) 6(-8.121,36.097) 7(-7.871,43.547) 8(-7.621,36.097) 9(-7.371,43.547) 10(-7.121,36.097) 11(-6.871,43.547) 12(-6.621,36.097) 13(-6.371,43.547) 14(-6.121,36.097) 15(-5.871,43.547) 16(-5.621,36.097) 17(-5.371,43.547) 18(-5.121,36.097) 19(-4.871,43.547) 20(-4.621,36.097) 21(-4.371,43.547) 22(-4.121,36.097) 23(-3.871,43.547) 24(-3.621,36.097) 25(-3.371,43.547) 26(-3.121,36.097) 27(-2.871,43.547) 28(-2.621,36.097) 29(-2.371,43.547) 30(-2.121,36.097) 31(-1.871,43.547) 32(-1.621,36.097) 33(-1.371,43.547) 34(-1.121,36.097) 35(-0.871,43.547) 36(-0.621,36.097) 37(-0.371,43.547) 38(-0.121,36.097) 39(0.129,43.547) 40(0.379,36.097) 41(0.629,43.547) 42(0.879,36.097) 43(1.129,43.547) 44(1.379,36.097) 45(1.629,43.547) 46(1.879,36.097) 47(2.129,43.547) 48(2.379,36.097) 49(2.629,43.547) 50(2.879,36.097) 51(3.129,43.547) 52(3.379,36.097) 53(3.629,43.547) 54(3.879,36.097) 55(4.129,43.547) 56(4.379,36.097) 57(4.629,43.547) 58(4.879,36.097) 59(7.129,43.547) 60(7.379,36.097) 61(7.629,43.547) 62(7.879,36.097) 63(8.129,43.547) 64(8.379,36.097) 65(8.629,43.547) 66(8.879,36.097) 67(9.129,43.547)
  rect 1.219x3.048 smd: 68(-10.48,42.823) 69(10.239,42.823)
  round 5.994 hole 3.2: 72(-0.121,-1.903) 73(-0.121,-19.903) 74(-0.121,-39.9)
CON_2_10_2_54
  rect 1.3x2.9 smd: 1(-44.378,-1.959) 2(-44.378,-7.559) 3(-41.838,-1.959) 4(-41.838,-7.559) 5(-39.298,-1.959) 6(-39.298,-7.559) 7(-36.758,-1.959) 8(-36.758,-7.559) 9(-34.218,-1.959) 10(-34.218,-7.559) 11(-31.678,-1.959) 12(-31.678,-7.559) 13(-29.138,-1.959) 14(-29.138,-7.559) 15(-26.598,-1.959) 16(-26.598,-7.559) 17(-24.058,-1.959) 18(-24.058,-7.559) 19(-21.518,-1.959) 20(-21.518,-7.559)
CRY4_3R20X2R50X0R80
  rect 1.4x1.2 smd: 1(-1.1,-0.85) 2(1.1,-0.85) 3(1.1,0.85) 4(-1.1,0.85)
D1206
  rect 1.524x1.524 smd: 1(1.727,0) 2(-1.727,0)
DO214AA
  rect 2.16x2.74 smd: 1(-2.21,0) 2(2.21,0)
DSUB9-RA-FE
  rect 1.524x1.524 hole 1.016: 1(-1.42,5.48)
  round 1.524 hole 1.016: 2(-1.42,2.74) 3(-1.42,0) 4(-1.42,-2.74) 5(-1.42,-5.48) 6(1.42,4.11) 7(1.42,1.37) 8(1.42,-1.37) 9(1.42,-4.11)
  round 4.2 hole 3.2: 10(0,12.5) 11(0,-12.5)
DSUB15B
  round 1.524 hole 1.1: 1(0,0) 2(2.3,0) 3(4.6,0) 4(6.9,0) 5(9.2,0) 6(-1.15,2.05) 7(1.15,2.05) 8(3.45,2.05) 9(5.75,2.05) 10(8.05,2.05) 11(0,4.1) 12(2.3,4.1) 13(4.6,4.1) 14(6.9,4.1) 15(9.2,4.1)
  oval 5.5x3 hole 3.5x1: 16(-8.225,2.05) 17(17.145,2.05)
E_C6
  rect 1.8x3.9 smd: 1(0,-3.001) 2(0,3.001)
E_E7
  rect 3.9x1.8 smd: 1(-4.05,0) 2(4.05,0)
EAR_JACK
  oval 2.184x2.489 hole 1.575: 1(13,4) 2(3.7,6) 3(9.3,6) 4(7.4,4) 5(1.2,4)
ESD0402
  custom 0.868x0.636 smd: 1(-0.635,-0.02)
  custom 0.86x0.636 smd: 2(0.622,0)
FB0603
  rect 0.813x0.813 smd: 1(-0.737,0) 2(0.737,0)
FPC30-050
  oval 0.254x2.032 smd: 1(7.25,0) 2(6.75,0) 3(6.25,0) 4(5.75,0) 5(5.25,0) 6(4.75,0) 7(4.25,0) 8(3.75,0) 9(3.25,0) 10(2.75,0) 11(2.25,0) 12(1.75,0) 13(1.25,0) 14(0.75,0) 15(0.25,0) 16(-0.25,0) 17(-0.75,0) 18(-1.25,0) 19(-1.75,0) 20(-2.25,0) 21(-2.75,0) 22(-3.25,0) 23(-3.75,0) 24(-4.25,0) 25(-4.75,0) 26(-5.25,0) 27(-5.75,0) 28(-6.25,0) 29(-6.75,0) 30(-7.25,0)
  rect 2.794x3.048 smd: 31(-9.365,2.7) 32(9.369,2.7)
HDMI-C
  round 1 hole 1 unplated: (-3.75,-1.7) (3.75,-1.7)
  oval 0.203x1.016 smd: 1(-3.6,-4.3) 2(-3.2,-4.3) 3(-2.8,-4.3) 4(-2.4,-4.3) 5(-2,-4.3) 6(-1.6,-4.3) 7(-1.2,-4.3) 8(-0.8,-4.3) 9(-0.4,-4.3) 10(0,-4.3) 11(0.4,-4.3) 12(0.8,-4.3) 13(1.2,-4.3) 14(1.6,-4.3) 15(2,-4.3) 16(2.4,-4.3) 17(2.8,-4.3) 18(3.2,-4.3) 19(3.6,-4.3)
  oval 1.8x2.8 hole 0.8x1.8: 20(-5.425,-2.5) 21(5.425,-2.5)
  oval 1.8x2.3 hole 0.8x1.3: 22(-5.425,2) 23(5.425,2)
HDRMS2MM-2X10
  rect 1.524x1.524 hole 0.914: 1(-9,-1)
  round 1.524 hole 0.914: 2(-9,1) 3(-7,-1) 4(-7,1) 5(-5,-1) 6(-5,1) 7(-3,-1) 8(-3,1) 9(-1,-1) 10(-1,1) 11(1,-1) 12(1,1) 13(3,-1) 14(3,1) 15(5,-1) 16(5,1) 17(7,-1) 18(7,1) 19(9,-1) 20(9,1)
HEAD2-79
  rect 1.27x1.27 hole 0.889: 1(-1,0)
  round 1.27 hole 0.889: 2(1,0)
HEADER2-3_8
  rect 2.286x2.286 hole 1.219: 1(-1.9,0)
  round 2.286 hole 1.219: 2(1.9,0)
HOLE2_3-M2
  round 4 hole 2.3: 1(0,0)
HOLE3_2X6
  round 5.994 hole 3.2: 1(0,0)
IJ3_IRM_3638
  round 1.778 hole 0.89: 1(-2.489,0) 2(0,0) 3(2.489,0)
IND2520
  rect 0.85x2.5 smd: 1(-1.225,0) 2(1.225,0)
IND_303015
  rect 3.4x1.3 smd: 1(0,1.05) 2(0,-1.05)
IND_606045
  rect 2.2x6 smd: 1(-1.9,0) 2(1.9,0)
JACK-2_5MM_B
  oval 5x2 hole 2.7x0.7: 1(0,0) 2(0,6.35)
  oval 2x5 hole 0.7x2.7: 3(-4.445,3.175)
KHS01
  rect 1.27x0.76 smd: 1(-3.8,0) 2(3.8,0)
L4X4-S
  rect 1.702x4.089 smd: 1(-1.7,0) 2(1.7,0)
L6X6-CDRH58D18R
  rect 2.108x5.588 smd: 1(-1.954,0) 2(1.954,0)
L0603
  rect 0.965x0.8 smd: 1(-0.8,0) 2(0.8,0)
LED0603
  rect 0.9x0.95 smd: 1(0.8,0) 2(-0.8,0)
LED-2012
  rect 1.2x1.3 smd: 1(-1,0) 2(1,0)
M2_KEY_B
  round 1.092 hole 1.092 unplated: (-10,0)
  round 5.5 hole 3.5: (0,-40.25) (0.011,-50.368)
  round 1.6 hole 1.6 unplated: (10,0)
  rect 0.254x1.575 smd: 1(-9.25,5.275) 2(-9,-2.275) 3(-8.75,5.275) 4(-8.5,-2.275) 5(-8.25,5.275) 6(-8,-2.275) 7(-7.75,5.275) 8(-7.5,-2.275) 9(-7.25,5.275) 10(-7,-2.275) 11(-6.75,5.275) 20(-4.5,-2.275) 21(-4.25,5.275) 22(-4,-2.275) 23(-3.75,5.275) 24(-3.5,-2.275) 25(-3.25,5.275) 26(-3,-2.275) 27(-2.75,5.275) 28(-2.5,-2.275) 29(-2.25,5.275) 30(-2,-2.275) 31(-1.75,5.275) 32(-1.5,-2.275) 33(-1.25,5.275) 34(-1,-2.275) 35(-0.75,5.275) 36(-0.5,-2.275) 37(-0.25,5.275) 38(0,-2.275) 39(0.25,5.275) 40(0.5,-2.275) 41(0.75,5.275) 42(1,-2.275) 43(1.25,5.275) 44(1.5,-2.275) 45(1.75,5.275) 46(2,-2.275) 47(2.25,5.275) 48(2.5,-2.275) 49(2.75,5.275) 50(3,-2.275) 51(3.25,5.275) 52(3.5,-2.275) 53(3.75,5.275) 54(4,-2.275) 55(4.25,5.275) 56(4.5,-2.275) 57(4.75,5.275) 58(5,-2.275) 59(5.25,5.275) 60(5.5,-2.275) 61(5.75,5.275) 62(6,-2.275) 63(6.25,5.275) 64(6.5,-2.275) 65(6.75,5.275) 66(7,-2.275) 67(7.25,5.275) 68(7.5,-2.275) 69(7.75,5.275) 70(8,-2.275) 71(8.25,5.275) 72(8.5,-2.275) 73(8.75,5.275) 74(9,-2.275) 75(9.25,5.275)
  rect 1.27x2.794 smd: M1(-10.35,4.5) M2(10.35,4.5)
M-BL-R8723BT1
  rect 2.5x1 smd: 1(-6,3.9) 2(-6,1.6) 3(-6,-1) 4(-6,-3.2) 5(6,3.4) 6(6,0.9) 7(6,-2.6) 8(6,-5.4)
  rect 1x2.5 smd: 9(3.6,-6.7) 10(2.3,-6.7) 11(1,-6.7) 12(-0.3,-6.7) 13(-1.6,-6.7) 14(-2.9,-6.7)
PCIE36-40-EDGE_X1
  rect 0.7x3.8 smd: A1(-6.96,0) A2(-5.96,0) A3(-4.96,0) A4(-3.96,0) A5(-2.96,0) A6(-1.96,0) A7(-0.96,0) A8(0.04,0) A9(1.04,0) A10(2.04,0) A11(3.04,0) A12(6.04,0) A13(7.04,0) A14(8.04,0) A15(9.04,0) A16(10.04,0) A17(11.04,0) A18(12.04,0) B1(-6.96,0) B2(-5.96,0) B3(-4.96,0) B4(-3.96,0) B5(-2.96,0) B6(-1.96,0) B7(-0.96,0) B8(0.04,0) B9(1.04,0) B10(2.04,0) B11(3.04,0) B12(6.04,0) B13(7.04,0) B14(8.04,0) B15(9.04,0) B16(10.04,0) B17(11.04,0) B18(12.04,0)
QFN6-0_95-3X3H
  rect 0.8x0.4 smd: 1(-1.5,0.95) 2(-1.5,0) 3(-1.5,-0.95) 4(1.5,-0.95) 5(1.5,0) 6(1.5,0.95)
  rect 1.27x2.286 smd: 7(0,0)
QFN12_2R00X3R00X1R00
  rect 1.5x0.25 smd: 1(-0.55,0.5) 2(-0.55,-0.5) 7(0.55,0)
  rect 0.25x0.7 smd: 3(-0.75,-1.45) 4(-0.25,-1.45) 5(0.25,-1.45) 6(0.75,-1.45) 9(0.75,1.45) 10(0.25,1.45) 11(-0.25,1.45) 12(-0.75,1.45)
  rect 0.7x0.25 smd: 8(0.95,0.5)
QFN32_4R00X4R00X0R90_T
  oval 0.7x0.2 smd: 1(-2,1.4)
  rect 0.7x0.2 smd: 2(-2,1) 3(-2,0.6) 4(-2,0.2) 5(-2,-0.2) 6(-2,-0.6) 7(-2,-1) 8(-2,-1.4) 17(2,-1.4) 18(2,-1) 19(2,-0.6) 20(2,-0.2) 21(2,0.2) 22(2,0.6) 23(2,1) 24(2,1.4)
  rect 0.2x0.7 smd: 9(-1.4,-2) 10(-1,-2) 11(-0.6,-2) 12(-0.2,-2) 13(0.2,-2) 14(0.6,-2) 15(1,-2) 16(1.4,-2) 25(1.4,2) 26(1,2) 27(0.6,2) 28(0.2,2) 29(-0.2,2) 30(-0.6,2) 31(-1,2) 32(-1.4,2)
  rect 2.8x2.8 smd: 33(0,0)
QFN40_5R00X5R00X0R90_T
  rect 0.65x0.25 smd: 1(-2.4,1.8) 2(-2.4,1.4) 3(-2.4,1) 4(-2.4,0.6) 5(-2.4,0.2) 6(-2.4,-0.2) 7(-2.4,-0.6) 8(-2.4,-1) 9(-2.4,-1.4) 10(-2.4,-1.8) 21(2.4,-1.8) 22(2.4,-1.4) 23(2.4,-1) 24(2.4,-0.6) 25(2.4,-0.2) 26(2.4,0.2) 27(2.4,0.6) 28(2.4,1) 29(2.4,1.4) 30(2.4,1.8)
  rect 0.25x0.65 smd: 11(-1.8,-2.4) 12(-1.4,-2.4) 13(-1,-2.4) 14(-0.6,-2.4) 15(-0.2,-2.4) 16(0.2,-2.4) 17(0.6,-2.4) 18(1,-2.4) 19(1.4,-2.4) 20(1.8,-2.4) 31(1.8,2.4) 32(1.4,2.4) 33(1,2.4) 34(0.6,2.4) 35(0.2,2.4) 36(-0.2,2.4) 37(-0.6,2.4) 38(-1,2.4) 39(-1.4,2.4) 40(-1.8,2.4)
  rect 3.5x3.5 smd: 41(0,0)
R0402
  rect 0.533x0.508 smd: 1(-0.419,0) 2(0.419,0)
R0805
  rect 1x1.2 smd: 1(-1,0) 2(1,0)
R1206
  rect 1.15x1.8 smd: 1(-1.6,0) 2(1.6,0)
RF
  rect 1.016x1.778 smd: 1(0,-1.524)
  rect 1.016x2.032 smd: 2(1.524,0) 3(-1.524,0)
RJ10-SRLBY
  round 3.2 hole 3.2 unplated: (-5.715,0) (5.715,0)
  rect 1.397x1.397 hole 0.914: 1(5.715,-8.89)
  round 1.397 hole 0.914: 2(4.445,-6.35) 3(3.175,-8.89) 4(1.905,-6.35) 5(0.635,-8.89) 6(-0.635,-6.35) 7(-1.905,-8.89) 8(-3.175,-6.35) 9(-4.445,-8.89) 10(-5.715,-6.35) 11(6.629,4.902) 12(4.089,4.902) 13(-4.089,4.902) 14(-6.629,4.902)
  round 2.159 hole 1.651: 15(7.747,-3.048) 16(-7.747,-3.048)
RP2_0405
  rect 0.5x0.3 smd: 1(-0.625,-0.275) 2(0.625,-0.275) 3(-0.625,0.275) 4(0.625,0.275)
SATA30_7P_V_DIP
  oval 0.92x1.27 hole 0.74: 1(0,0) 2(-1.27,1) 3(-2.54,1) 4(-3.81,0) 5(-5.08,1) 6(-6.35,1) 7(-7.62,0)
  round 2.35 hole 1.35: 8(2.67,0.5) 9(-10.29,0.5)
SATA-IDE4M_5R08_DIP
  round 2.5 hole 1.8: 1(0,0) 2(5.08,0) 3(10.16,0) 4(15.24,0)
SIP4-100
  rect 1.575x1.575 hole 1.168: 1(0,0)
  round 1.575 hole 1.168: 2(-2.54,0) 3(-5.08,0) 4(-7.62,0)
SIP6-FA1
  rect 1.651x2.8 hole 0.8: 1(-5,0)
  oval 1.651x2.667 hole 0.8: 2(-3,0) 3(-1,0) 4(1,0) 5(3,0) 6(5,0)
SO8_1P27_4X5
  rect 1.6x0.61 smd: 1(-2.7,1.905) 2(-2.7,0.635) 3(-2.7,-0.635) 4(-2.7,-1.905) 5(2.7,-1.905) 6(2.7,-0.635) 7(2.7,0.635) 8(2.7,1.905)
SOD_123
  rect 1x1 smd: 1(-1.8,0) 2(1.8,0)
SOD_323
  rect 0.8x0.6 smd: 1(-1.2,0) 2(1.2,0)
SOIC8
  rect 1.27x0.635 smd: 1(-2.477,1.905) 2(-2.477,0.635) 3(-2.477,-0.635) 4(-2.477,-1.905) 5(2.477,-1.905) 6(2.477,-0.635) 7(2.477,0.635) 8(2.477,1.905)
SOIC16
  oval 2.2x0.6 smd: 1(-2.6,4.445) 2(-2.6,3.175) 3(-2.6,1.905) 4(-2.6,0.635) 5(-2.6,-0.635) 6(-2.6,-1.905) 7(-2.6,-3.175) 8(-2.6,-4.445) 9(2.6,-4.445) 10(2.6,-3.175) 11(2.6,-1.905) 12(2.6,-0.635) 13(2.6,0.635) 14(2.6,1.905) 15(2.6,3.175) 16(2.6,4.445)
SOT23-5
  rect 0.65x1 smd: 1(-0.95,-1.25) 2(0,-1.25) 3(0.95,-1.25) 4(0.95,1.25) 5(-0.95,1.25)
SOT-23
  rect 1x1.2 smd: 1(0.965,1.168) 2(-0.94,1.168) 3(0,-1.181)
SOT_23
  rect 0.8x1.1 smd: 1(-0.95,-1.1) 2(0.95,-1.1) 3(0,1.1)
SOT_23_5
  oval 1.1x0.6 smd: 1(0,0)
  rect 1.1x0.6 smd: 2(0,-1) 3(0,-2) 4(2.8,-2) 5(2.8,0)
SOT_23_6
  oval 1x0.7 smd: 1(-1.3,0.95)
  rect 1x0.7 smd: 2(-1.3,0) 3(-1.3,-0.95) 4(1.3,-0.95) 5(1.3,0) 6(1.3,0.95)
SOT_323
  rect 0.7x0.9 smd: 1(-0.65,-0.95) 2(0.65,-0.95) 3(0,0.95)
SW4-SMD
  rect 1.5x1 smd: 1(-2.75,-1.8) 2(2.75,-1.8) 3(2.75,1.8) 4(-2.75,1.8)
SWITCH_DDSZ
  rect 1.524x1.524 hole 1.016: 1(0,-5.334)
  round 1.524 hole 1.016: 2(2.54,-5.334) 3(5.08,-5.334) 4(5.08,0) 5(2.54,0) 6(0,0)
TF-CARD
  round 1 hole 1 unplated: (0,4) (0,-4)
  rect 1.6x0.711 smd: 1(-11,3.2) 2(-11,2.1) 3(-11,1) 4(-11,-0.1) 5(-11,-1.2) 6(-11,-2.3) 7(-11,-3.4) 8(-11,-4.5) 9(-11,-5.6)
  rect 1.6x1.397 smd: 10(-10.254,-7.029)
  rect 2.21x1.194 smd: 11(-0.4,-6.927) 13(-0.4,8.7)
  rect 1.397x1.6 smd: 12(-10,7.8)
TP_0R70
  round 0.7 smd: 1(0,0)
TSSOP16-26-170
  rect 0.33x1.651 smd: 1(-2.276,-2.794) 2(-1.626,-2.794) 3(-0.975,-2.794) 4(-0.325,-2.794) 5(0.325,-2.794) 6(0.975,-2.794) 7(1.626,-2.794) 8(2.276,-2.794) 9(2.276,2.794) 10(1.626,2.794) 11(0.975,2.794) 12(0.325,2.794) 13(-0.325,2.794) 14(-0.975,2.794) 15(-1.626,2.794) 16(-2.276,2.794)
unnamed
  round 1 smd: (0,0)
USB30A9_25R70X7R32X13R85
  round 1.1 hole 0.7: 1(-3.5,-0.9) 2(-1,-0.9) 3(1,-0.9) 4(3.5,-0.9) 5(4,0.9) 6(2,0.9) 7(0,0.9) 8(-2,0.9) 9(-4,0.9)
  oval 2.5x1.2 hole 2.1x0.8: 10(-5.35,2.71)
  oval 2x1.4 hole 1.4x0.7: 11(-5.35,-2.71) 13(5.35,2.71)
  oval 2.7x1.4 hole 2.1x0.8: 12(5.35,-2.71)
USB-A2
  round 1.651 hole 1: 1(0,0) 4(-7,0)
  round 1.524 hole 1: 2(-2.504,0) 3(-4.498,0)
  round 3.81 hole 2: 5(3.084,2.718) 6(-10.074,2.718)

## Nets
